# Altium PCB CLRC663DesignPCB.PcbDoc
Units mil, origin at the board's own origin, x right, y up, seen from the top; angles counter-clockwise.
Board outline 1995 x 2135 mil, 2 copper layers (Top Layer, Bottom Layer); 58 components, 39 nets, 161 pads, 1 vias.
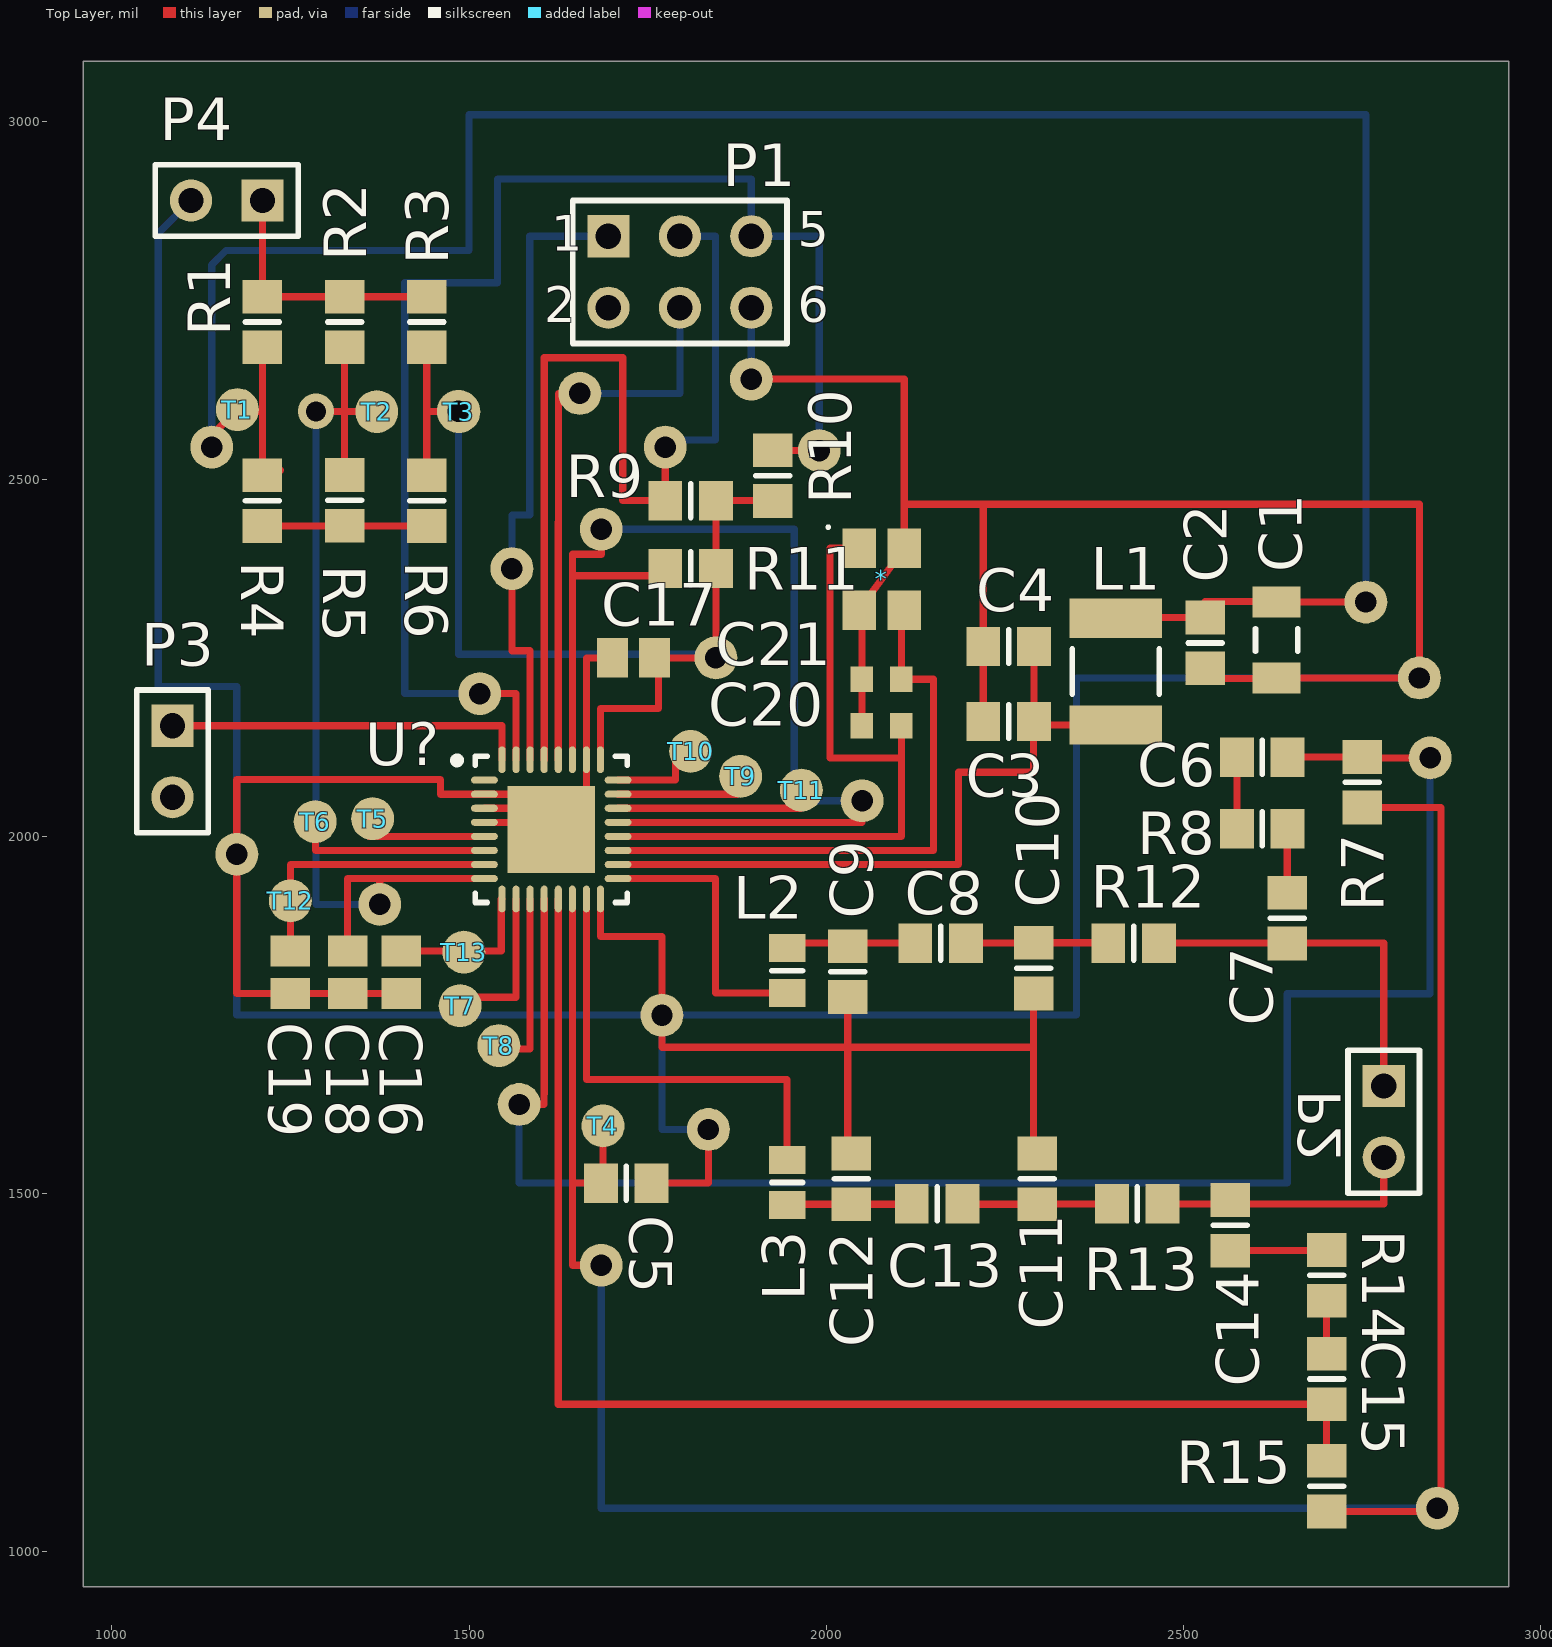
[diagram p0: Top Layer view]
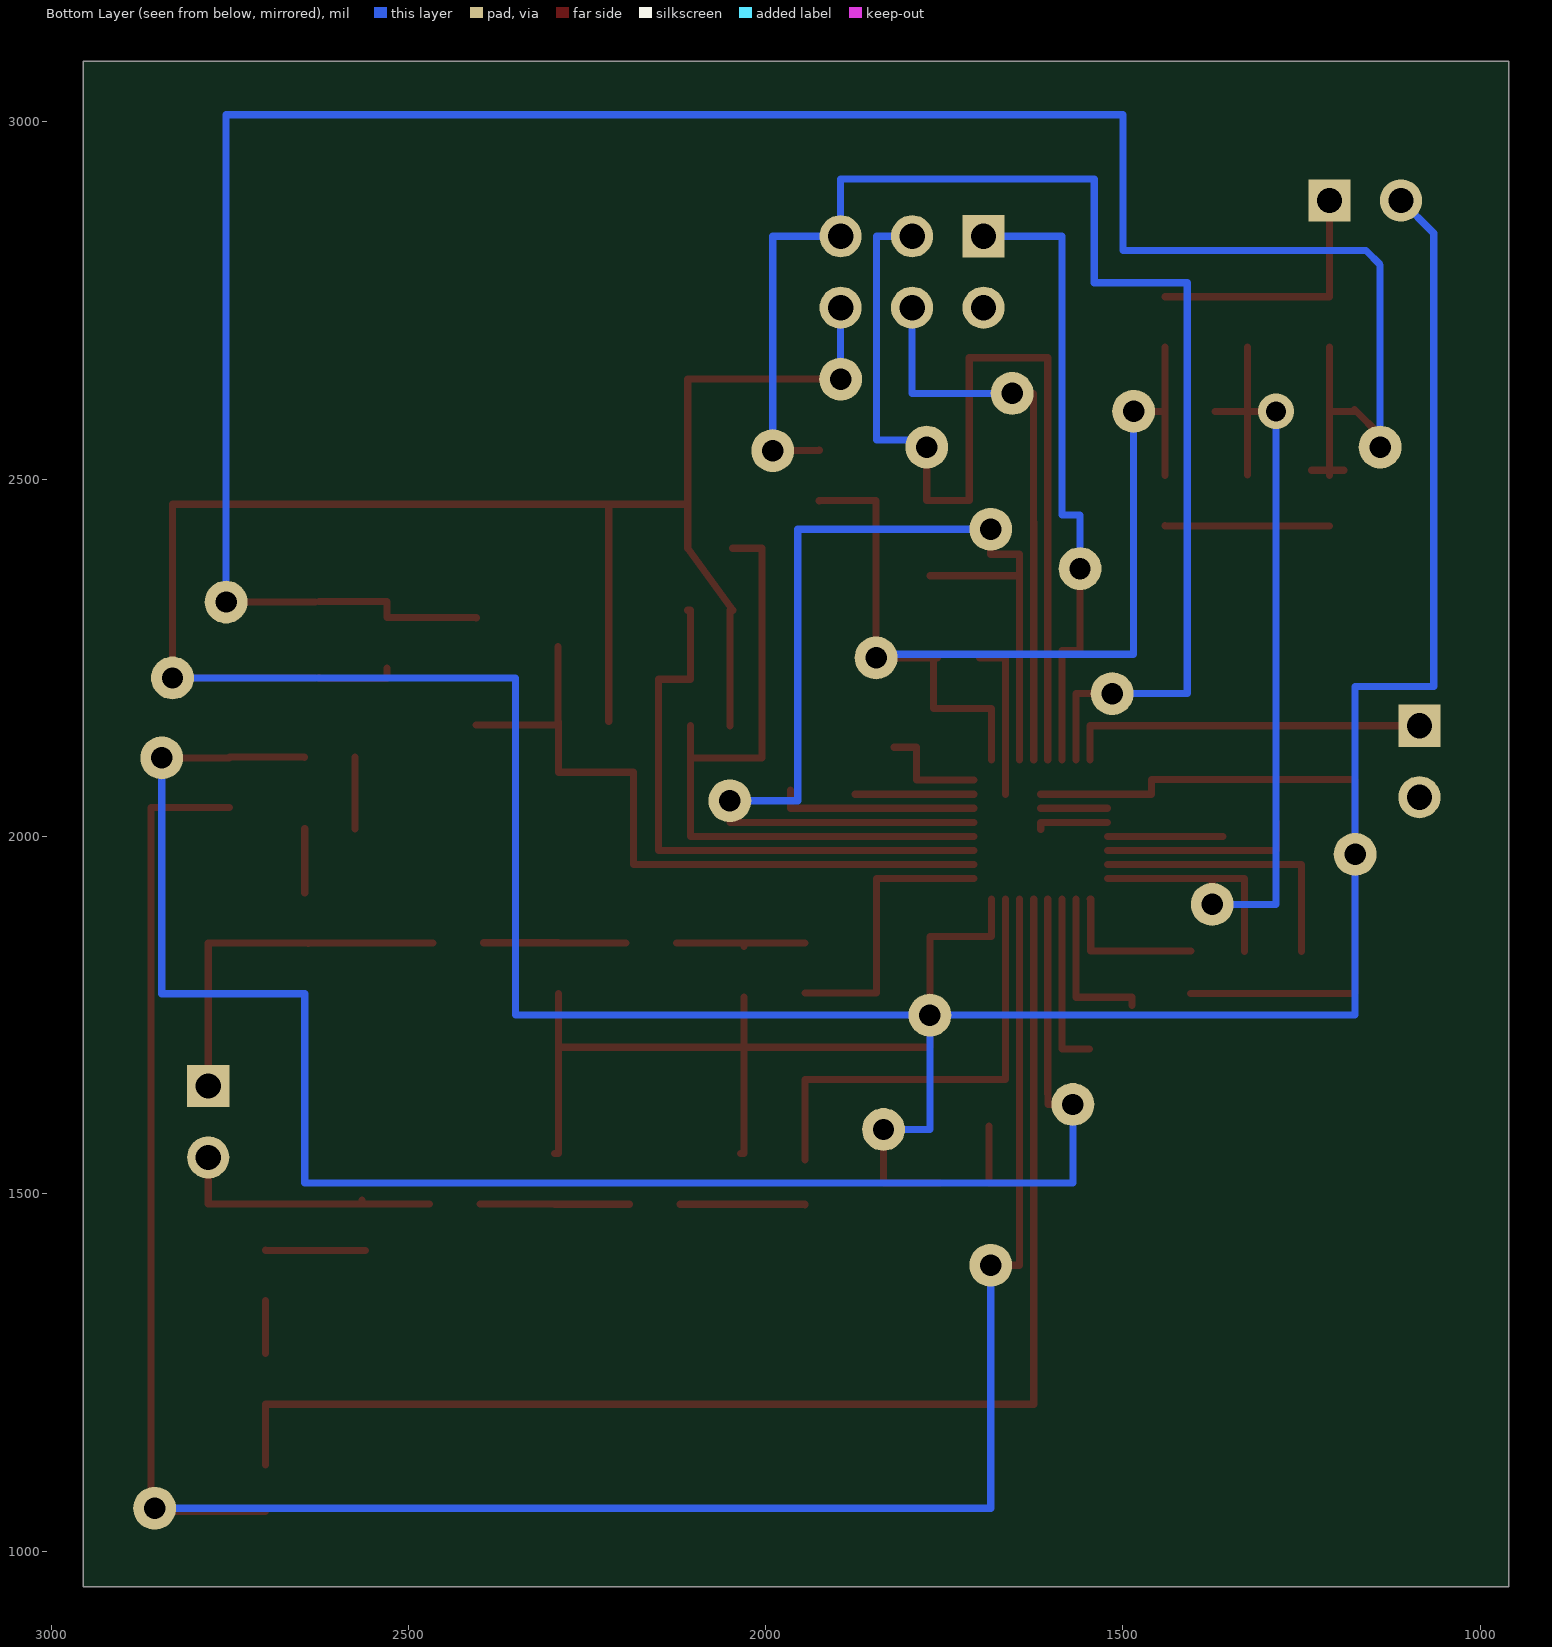
[diagram p1: Bottom Layer view, seen from below]

## Layer stack, top to bottom
Top Solder: solder mask 0.4, Solder Resist, Dk 3.5
Top Layer: signal copper 1.4
Dielectric 1: dielectric 12.6, FR-4, Dk 4.8
Bottom Layer: signal copper 1.4
Bottom Solder: solder mask 0.4, Solder Resist, Dk 3.5

## Board outline
960,950 960,3085 2955,3085 2955,950

## Design rules (kind name [scope] priority, off if disabled: settings)
Clearance [All] p1: gap=10
PolygonConnect [All] p1: connectstyle=Relief reliefconductorwidth=10 reliefentries=4 polygonreliefangle="90 Angle" airgapwidth=10
RoomDefinition CLRC663Design [InComponentClass('CLRC663Design')] p1: confinementstyle=ConfineIn formatcopy=TRUE lockcomponents=FALSE outline 1000,1014.13 1125,1014.13 1125,1135 1000,1135
RoutingVias [All] p1: holewidth=28 width=50 viastyle="Through Hole" minholewidth=28 minwidth=50 maxholewidth=28 maxwidth=50
SolderMaskExpansion [All] p1: expansion=4
Width [All] p1: maxlimit=10 minlimit=10 preferedwidth=10
30 further rules are at their usual default settings.

## Components (designator, comment, footprint, x,y, rotation, side; value= is the part's Value field where it differs from the comment)
* "Crystal" DFN220P355X80-4N 2077.44,2360 r270 top
C1 "Cap" C1206 2630,2275 r270 top
C2 "Cap" 6-0805_N 2530,2270.87 r270 top
C3 "Cap" 6-0805_N 2255,2160.87 r180 top
C4 "Cap" 6-0805_N 2255,2265.87 r180 top
C5 "Cap" 6-0805_N 1720,1515 r0 top
C6 "Cap" 6-0805_N 2610,2110.87 r0 top
C7 "Cap" 6-0805_N 2645,1885.87 r270 top
C8 "Cap" 6-0805_N 2160,1850.87 r180 top
C9 "Cap" 6-0805_N 2030,1810.87 r90 top
C10 "Cap" 6-0805_N 2290,1815.87 r270 top
C11 "Cap" 6-0805_N 2295,1520.87 r270 top
C12 "Cap" 6-0805_N 2035,1520.87 r90 top
C13 "Cap" 6-0805_N 2155,1485.87 r180 top
C14 "Cap" 6-0805_N 2565,1455.87 r270 top
C15 "Cap" 6-0805_N 2700,1240.87 r270 top
C16 "Cap Pol3" C0805 1405,1810 r270 top
C17 "Cap Pol3" C0805 1730,2250 r180 top
C18 "Cap Pol3" C0805 1330,1810 r270 top
C19 "Cap Pol3" C0805 1250,1810 r270 top
C20 "Cap Semi" 1608[0603] 2077.44,2155 r0 top
C21 "Cap Semi" 1608[0603] 2077.44,2220 r0 top
L1 "Inductor" INDC4532 2405,2230.87 r90 top
L2 "Inductor" 6-0805_L 1945,1812.36 r90 top
L3 "Inductor" 6-0805_L 1945,1515.87 r270 top
P1 "SPI" HDR2X3 1695,2840 r0 top
P2 "Header 2" HDR1X2 2780,1650.87 r270 top
P3 "Interrupt" HDR1X2 1085,2155 r270 top
P4 "Power" HDR1X2 1210.87,2890 r180 top
R1 "0R DNP" 6-0805_N 1210.87,2720 r90 top
R2 "0R DNP" 6-0805_N 1325.87,2720 r90 top
R3 "0R DNP" 6-0805_N 1440.87,2720 r90 top
R4 "0R DNP" 6-0805_N 1210.87,2470 r90 top
R5 "0R" 6-0805_N 1325.87,2470.43 r90 top
R6 "0R" 6-0805_N 1440.87,2470 r90 top
R7 "Res3" 6-0805_N 2750,2075.87 r270 top
R8 "Res3" 6-0805_N 2610,2010.87 r0 top
R9 "Res3" 6-0805_N 1810,2470 r0 top
R10 "Res3" 6-0805_N 1925,2505 r270 top
R11 "Res3" 6-0805_N 1810,2375 r0 top
R12 "Res3" 6-0805_N 2430,1850.87 r0 top
R13 "Res3" 6-0805_N 2435,1485.87 r0 top
R14 "Res3" 6-0805_N 2700,1385.87 r90 top
R15 "Res3" 6-0805_N 2700,1090.87 r270 top
T1 "TVDD" PCBComponent_1 50860.87,-47017.5 r270 top
T2 "VDD" PCBComponent_1 51055.87,-47020.43 r270 top
T3 "PVDD" PCBComponent_1 51170.87,-47020.43 r270 top
T4 "VMID" PCBComponent_1 -47997.56,51210 r90 top
T5 "SIGIN" PCBComponent_1 -48320,51640 r90 top
T6 "SIGOUT" PCBComponent_1 -48330.43,-47664.13 r180 top
T7 "AUX1" PCBComponent_1 51102.44,51448.27 r0 top
T8 "AUX2" PCBComponent_1 -48143.27,51322.44 r90 top
T9 "SCL2" PCBComponent_1 51495,51769.13 r0 top
T10 "SDA2" PCBComponent_1 -47875,51734.13 r90 top locked
T11 "CLCKOUT" PCBComponent_1 51580,51750 r0 top
T12 "DVDD" PCBComponent_1 50865,51595 r0 top
T13 "AVDD" PCBComponent_1 -48192.13,51453.27 r90 top locked
U? "CLRC663" QFN50P500X500X100_HS-33N 1615,2010 r0 top

## Footprints (in the part's own frame and the unit in brackets; to place one, negate y for a bottom-side part, rotate by r counter-clockwise, add the part's x,y. Pads: shape width x height; smd on the part's side, far side on the other; paste and mask are expansions set on the pad)
6-0805_L [mm] "Chip Resistor, Body 2.0x1.2mm, IPC High Density"
  rect 1x1.3 smd: 1(-0.8,0) 2(0.8,0)
  silkscreen extent 0,-0.55 0,0.55, body extent -1.07,-0.7 1.07,0.7, height 0.7
6-0805_N [mm] "Chip Resistor, Body 2.0x1.2mm, IPC Medium Density"
  rect 1.2x1.4 smd: 1(-0.9,0) 2(0.9,0)
  silkscreen extent 0,-0.6 0,0.6, body extent -1.07,-0.7 1.07,0.7, height 0.7
1608[0603] [mm] "Chip Capacitor, Body 1.6x0.8mm, IPC High Density"
  rect 0.8x0.9 smd: 1(-0.7,0) 2(0.7,0)
  body extent -0.87,-0.48 0.87,0.48, height 1.3
C0805 [mm] "Chip Capacitor, Body 2.0x1.3mm, IPC High Density"
  rect 1.1x1.4 smd: 1(-0.75,0) 2(0.75,0)
  body extent -1.1,-0.72 1.1,0.72, height 1.4
C1206 [mm] "Chip Capacitor, Body 3.2x1.6mm, IPC High Density"
  rect 1.1x1.7 smd: 1(-1.35,0) 2(1.35,0)
  silkscreen extent -0.4,-0.75 0.4,0.75, body extent -1.7,-0.9 1.7,0.9, height 1.3
DFN220P355X80-4N [mm] "DFN, 4-Leads, Body 2.90x3.55mm, Pitch 2.20mm, IPC Medium Density"
  rect 1.4x1.2 smd: 1(-1.1,-0.8) 2(-1.1,0.8) 3(1.1,0.8) 4(1.1,-0.8)
  silkscreen extent -1.9,-1.95 -1.8,-1.85, body extent -1.85,-1.5 1.85,1.5, height 0.8
HDR1X2 [mm] "Connector; Header; 2 Position"
  rect 1.5x1.5 hole 0.9: 1(0,0)
  round 1.5 hole 0.9: 2(2.54,0)
  silkscreen extent -1.27,-1.27 3.81,1.27
HDR2X3 [mm] "Connector; Header; 3x2 Position"
  rect 1.5x1.5 hole 0.9: 1(0,0)
  round 1.5 hole 0.9: 2(0,-2.54) 3(2.54,0) 4(2.54,-2.54) 5(5.08,0) 6(5.08,-2.54)
  silkscreen extent -1.27,-3.81 6.35,1.27
INDC4532 [mm] "Chip Inductor, Body 4.5x3.2mm, IPC High Density"
  rect 1.4x3.3 smd: 1(-1.9,0) 2(1.9,0)
  silkscreen extent -0.8,-1.55 0.8,1.55, body extent -2.4,-1.7 2.4,1.7, height 0.55
PCBComponent_1 [mil]
  round 60 smd: 1(-49615,-49685)
QFN50P500X500X100_HS-33N [mm] "QFN, 32-Leads, Body 5.00x5.00mm, Pitch 0.50mm, Thermal Pad 3.10x3.10mm, IPC Medium Density"
  oval 0.95x0.25 smd: 1(-2.375,1.75) 2(-2.375,1.25) 3(-2.375,0.75) 4(-2.375,0.25) 5(-2.375,-0.25) 6(-2.375,-0.75) 7(-2.375,-1.25) 8(-2.375,-1.75) 17(2.375,-1.75) 18(2.375,-1.25) 19(2.375,-0.75) 20(2.375,-0.25) 21(2.375,0.25) 22(2.375,0.75) 23(2.375,1.25) 24(2.375,1.75)
  oval 0.25x0.95 smd: 9(-1.75,-2.475) 10(-1.25,-2.475) 11(-0.75,-2.475) 12(-0.25,-2.475) 13(0.25,-2.475) 14(0.75,-2.475) 15(1.25,-2.475) 16(1.75,-2.475) 25(1.75,2.475) 26(1.25,2.475) 27(0.75,2.475) 28(0.25,2.475) 29(-0.25,2.475) 30(-0.75,2.475) 31(-1.25,2.475) 32(-1.75,2.475)
  rect 3.1x3.1 smd: 33(0,0)
  silkscreen extent -3.47,-2.6 2.7,2.6, body extent -2.55,-2.45 2.55,2.45, height 1

## Part data
*: library part Component_1
C1 C2 C3 C4 C5 C6 C7 C8 C9 C10 C11 C12 C13 C14 C15: "Capacitor"
C16 C17 C18 C19: "Polarized Capacitor (Surface Mount)"
C20 C21: "Capacitor (Semiconductor SIM Model)"
P1: library part "Header 3X2", "Header, 3-Pin, Dual row"
P2: "Header, 2-Pin"
P3 P4: library part "Header 2", "Header, 2-Pin"
R1 R2 R3 R4 R5 R6: library part RESC0805, "RESC0805"
R7 R8 R9 R10 R11 R12 R13 R14 R15: "Resistor"
T1 T2 T3 T4 T5 T6 T7 T8 T9 T10 T11 T12 T13: library part Testpoint

## Free pads (board coordinates)
  round 60 hole 30: 9(2050,2050) 10(1375,1905) 13(1570,1625) 14(2845,2110) 15(1770,1750) 16(2755,2328.15) 18(1515,2200) 19(1560,2375) 22(1685,1400) 23(2855,1060) 24(1835,1590) 25(1175,1975) 26(1655,2620) 27(1845.43,2250) 28(1485,2595) 29(1140,2545) 30(1990,2540) 31(1774.57,2545) 33(1895,2640) 35(2830,2221.85) 36(1685,2430)

## Via types
v1: diameter 50, hole 28, Top Layer to Bottom Layer, 1 vias

## Nets (pads, with @x,y where several pads share a name; then routed paths per layer and width w, separated by ;. In a path a pad name is that pad's centre, name@x,y a point inside that pad or via, vN(x,y) a via of type N, cw(c..) or ccw(c..) an arc to the next point about the centre after c; other vN are vias at no path point)
+3.3V: R4.1 R5.1 R6.1 | length 230.4
  Top Layer w10: R4.1 R6.1 R6.1@1440.87,2435
+5V: P4.1 R1.2 R2.2 R3.2 | length 364.6
  Top Layer w10: P4.1 R1.2 R2.2 R3.2
GND: *.2 *.4 C1.2 C2.2 C3.2 C4.2 C5.2 C9.1 C10.2 C11.1 C12.2 C16.2 C17.2 C18.2 C19.2 C20.1 C21.1 P1.6 P4.2 pad.15 pad.24 pad.25 pad.33 pad.35 U?.2 U?.3 U?.4 U?.16 U?.26 U?.33 | length 8855.7
  Top Layer w10: C16.2 C18.2 C19.2 1175,1780.47 pad.25 1175,2080 1460,2080 1460,2059.21 U?.2 U?.33@1615,2059.21 ; U?.4 1615,2019.84 U?.33 ; U?.3 U?.33@1615,2039.53 ; U?.33@1664.21,2059.21 U?.26 1664.21,2250 C17.2 ; U?.16 1683.9,1860 1770,1860 pad.15 1770,1705 2030,1705 ; C5.2 1835,1515 pad.24 ; pad.33 2108.94,2640 2108.94,2465 ; C9.1 2030,1705 ; C12.2 2030,1556.3 2030,1705 ; *.4 2047.31,2318.57 *.2 2108.94,2465 ; C20.1 C21.1 *.4@2049.88,2316.69 ; C3.2 C4.2 2219.57,2465 ; C10.2 2290,1705 ; C11.1 2290,1556.3 2290,1705 ; C2.2 2530,2220.87 2625,2220.87 C1.2@2625,2222.72 ; C1.2 pad.35 2830,2465 2219.57,2465 ; 2030,1705 2290,1705 ; 2108.94,2465 2219.57,2465
  Bottom Layer w10: P4.2 1065,2844.13 1065,2210 1175,2210 pad.25 1175,1750 pad.15 ; pad.24 1770,1590 pad.15 ; pad.33 P1.6 ; pad.35 2350,2221.85 2350,1750 pad.15
Net*_1: *.1 C20.2 U?.20 | length 985.5
  Top Layer w10: U?.20 2105,2000.16 ; *.1 2004.88,2403.31 2004.88,2110 2105,2110 ; 2105,2000.47 2105,2110 ; C20.2 2105,2110
Net*_3: *.3 C21.2 U?.19 | length 826.3
  Top Layer w10: U?.19 2150,1980.47 ; *.3 2105,2316.69 C21.2 2150,2220 2150,1980.79
NetC3_1: C3.1 C4.1 L1.1 U?.18 | length 1006.1
  Top Layer w10: U?.18 2185,1960.79 ; 2185,1961.1 2185,2090 2290,2090 2290,2160.87 C3.1 ; C4.1 C3.1 ; L1.1 2290.43,2156.06 C3.1
NetC5_1: C5.1 pad.22 pad.23 R7.2 R15.2 T4.1 U?.14 | length 3441.4
  Top Layer w10: U?.14 1644.53,1515 ; pad.22 1644.53,1400 1644.53,1515 ; T4.1 1687.44,1515 C5.1 1644.53,1515 ; R15.2@2700,1055.87 R15.2 2860,1055.43 2860,2040.43 R7.2
  Bottom Layer w10: pad.22 1685,1060 pad.23
NetC6_1: C6.1 R8.1 | length 100
  Top Layer w10: R8.1 C6.1
NetC6_2: C6.2 pad.13 pad.14 R7.1 U?.12 | length 2529
  Top Layer w10: pad.13@1560,1625 pad.13 1605,1625 1605,1640 1605.16,1640 U?.12 ; C6.2 2645.43,2111.3 R7.1 2750,2110 pad.14 pad.14@2860,2110
  Bottom Layer w10: pad.13 1570,1515 2645,1515 2645,1780 2845,1780 pad.14
NetC7_1: C7.1 R8.2 | length 89.6
  Top Layer w10: C7.1 R8.2@2645,2010.87
NetC7_2: C7.2 P2.1 R12.2 | length 515
  Top Layer w10: R12.2 C7.2@2640,1850.87 ; C7.2@2640,1850.43 C7.2@2640,1850.87 ; P2.1 2780,1850.87 C7.2@2640,1850.87
NetC8_1: C8.1 C10.1 R12.1 | length 200
  Top Layer w10: C8.1 2290,1850.87 C10.1 2394.57,1851.3 R12.1
NetC8_2: C8.2 C9.2 L2.2 | length 184.1
  Top Layer w10: L2.2@1945,1850.87 C9.2@2030,1850.87 ; C9.2 C9.2@2030,1850.87 ; C8.2 C9.2@2030,1850.87
NetC11_2: C11.2 C13.1 R13.1 | length 210
  Top Layer w10: C13.1 2190.43,1485.43 C11.2 2295,1485.87 R13.1
NetC12_1: C12.1 C13.2 L3.2 | length 176.1
  Top Layer w10: L3.2 1945,1485.43 C12.1 2119.57,1485.43 C13.2
NetC14_1: C14.1 P2.2 R13.2 | length 375.9
  Top Layer w10: R13.2 2780,1485.87 P2.2 ; C14.1@2565,1490 C14.1
NetC14_2: C14.2 R14.2 | length 140.9
  Top Layer w10: C14.2@2560,1420.43 2700,1420.43 R14.2
NetC15_1: C15.1 R14.1 | length 74.1
  Top Layer w10: C15.1 R14.1
NetC15_2: C15.2 R15.1 U?.13 | length 1866.9
  Top Layer w10: U?.13 1624.84,1205.43 C15.2 R15.1 R15.1@2700,1120.87
NetC16_1: C16.1 T13.1 U?.9 | length 213.7
  Top Layer w10: C16.1@1405,1840 1545,1840 1545,1912.56 U?.9
NetC19_1: C19.1 T12.1 U?.7 | length 392.8
  Top Layer w10: C19.1 1250,1960.79 U?.7
NetL2_1: L2.1 U?.17 | length 396.7
  Top Layer w10: U?.17 1845,1941.1 1845,1780.87 L2.1
NetL3_1: L3.1 U?.15 | length 645.7
  Top Layer w10: 1664.21,1660 U?.15 ; 1664.53,1660 1945,1660 L3.1
NetP1_5: P1.5 pad.18 pad.30 R10.1 U?.31 | length 2003.8
  Top Layer w10: pad.18@1505,2200 pad.18 1565.79,2200 U?.31 ; R10.1 1925,2540 pad.30
  Bottom Layer w10: pad.18 1410,2200 1410,2775 1540,2775 1540,2920 1895,2920 P1.5 1990,2840 pad.30
NetP3_1: P3.1 U?.32 | length 508.7
  Top Layer w10: P3.1 1546.1,2155 U?.32
NetR11_1: pad.9 pad.36 R11.1 U?.21 U?.27 | length 1590.2
  Top Layer w10: U?.27 1644.53,2365 ; pad.36 1685,2395 1644.53,2395 1644.53,2365 ; U?.21 2050,2019.84 pad.9@2050,2035 ; R11.1@1770,2365 1644.53,2365
  Bottom Layer w10: pad.36 1955,2430 1955,2050 pad.9
NetT5_1: T5.1 U?.5 | length 161.5
  Top Layer w10: T5.1@1360,2000.16 U?.5
NetT6_1: T6.1 U?.6 | length 276
  Top Layer w10: 1285,1980.47 U?.6 ; 1285,1981.34 T6.1@1285,2020.87
NetT7_1: T7.1 U?.10 | length 227.6
  Top Layer w10: T7.1 1487.44,1775 1565.79,1775 U?.10
NetT8_1: T8.1 U?.11 | length 248.9
  Top Layer w10: T8.1@1546.73,1702.44 1585.47,1702.44 U?.11
NetT9_1: T9.1 U?.23 | length 166.5
  Top Layer w10: U?.23 T9.1@1875,2059.21
NetT10_1: T10.1 U?.24 | length 157.6
  Top Layer w10: U?.24 1788.9,2078.9 1788.9,2125 T10.1@1820,2125
NetT11_1: T11.1 U?.22 | length 282
  Top Layer w10: U?.22 1965,2039.53 T11.1
PVDD: C17.1 pad.27 pad.28 R3.1 R6.2 R9.2 R10.2 R11.2 T3.1 U?.25 | length 1539.6
  Top Layer w10: R6.2 1440.87,2595 ; R3.1 1440.87,2595 ; T3.1 1485.87,2595 pad.28 1440.87,2595 ; U?.25 1683.9,2178.9 1765,2178.9 C17.1@1765,2250 ; C17.1 C17.1@1765,2250 ; R10.2 1925,2470 R9.2 R11.2 pad.27 C17.1@1765,2250
  Bottom Layer w10: pad.28 1485,2255 1845.43,2255 pad.27
RX_MOSI_A1: P1.4 pad.26 U?.28 | length 827.4
  Top Layer w10: U?.28 1624.84,2440 ; 1625.16,2415 1625.16,2620 pad.26
  Bottom Layer w10: pad.26 1795,2620 P1.4
SCK_SCL: P1.3 pad.31 R9.1 U?.29 | length 1432.4
  Top Layer w10: U?.29 1605.16,2670 1715,2670 1715,2470 R9.1 pad.31 pad.31@1774.57,2555
  Bottom Layer w10: pad.31 1774.57,2555 1845,2555 1845,2840 P1.3
TVDD: C1.1 C2.1 L1.2 pad.16 pad.29 R1.1 R4.2 T1.1 | length 3470
  Top Layer w10: pad.29@1140,2535 pad.29 1140,2561.63 T1.1 ; T1.1@1175.87,2595 1210.87,2595 ; R4.2@1190.87,2512.5 R4.2@1210.87,2512.5 ; R4.2 R4.2@1210.87,2512.5 ; R1.1 1210.87,2595 ; R4.2@1235.87,2512.5 R4.2@1210.87,2512.5 ; L1.2 2405,2306.3 C2.1 2530,2329.02 C1.1@2625,2329.02 ; C1.1 pad.16 pad.16@2770,2328.15 ; R4.2@1210.87,2512.5 1210.87,2595
  Bottom Layer w10: pad.29 1140,2800 1160,2820 1500,2820 1500,3010 2755,3010 pad.16
TX_MISO_A2: P1.1 pad.19 U?.30 | length 893
  Top Layer w10: pad.19 1560,2260 1585.47,2260 U?.30
  Bottom Layer w10: pad.19 1560,2450 1585,2450 1585,2840 P1.1
VDD: C18.1 pad.10 R2.1 R5.2 T2.1 U?.8 | length 1382.4
  Top Layer w10: v1(1285.87,2595) 1285.87,2594.57 1325.87,2594.57 ; R5.2 1325.87,2594.57 ; R2.1 1325.87,2594.57 ; C18.1 1330,1941.1 1375,1941.1 ; T2.1 1325.87,2594.57 ; pad.10@1375,1895 pad.10 1375,1941.1 ; U?.8 1375,1941.1
  Bottom Layer w10: v1(1285.87,2595) 1285.87,1905 pad.10
pads on no net: P1.2 P3.2 U?.1

## Text inside footprints (layer, text, board x,y; h text height)
P1: Top Overlay "1" at 1615,2820 h50; Top Overlay "2" at 1605,2720 h50; Top Overlay "5" at 1960,2825 h50; Top Overlay "6" at 1960,2720 h50